# Altium PCB AVR精简学习板.PcbDoc (part 7 of 10)
Units mm, origin at the board's own origin, x right, y up, seen from the top; angles counter-clockwise.
Board outline 152.4 x 101.6 mm, 2 copper layers (Top Layer, Bottom Layer); 44 components, 51 nets, 211 pads, 6 vias.
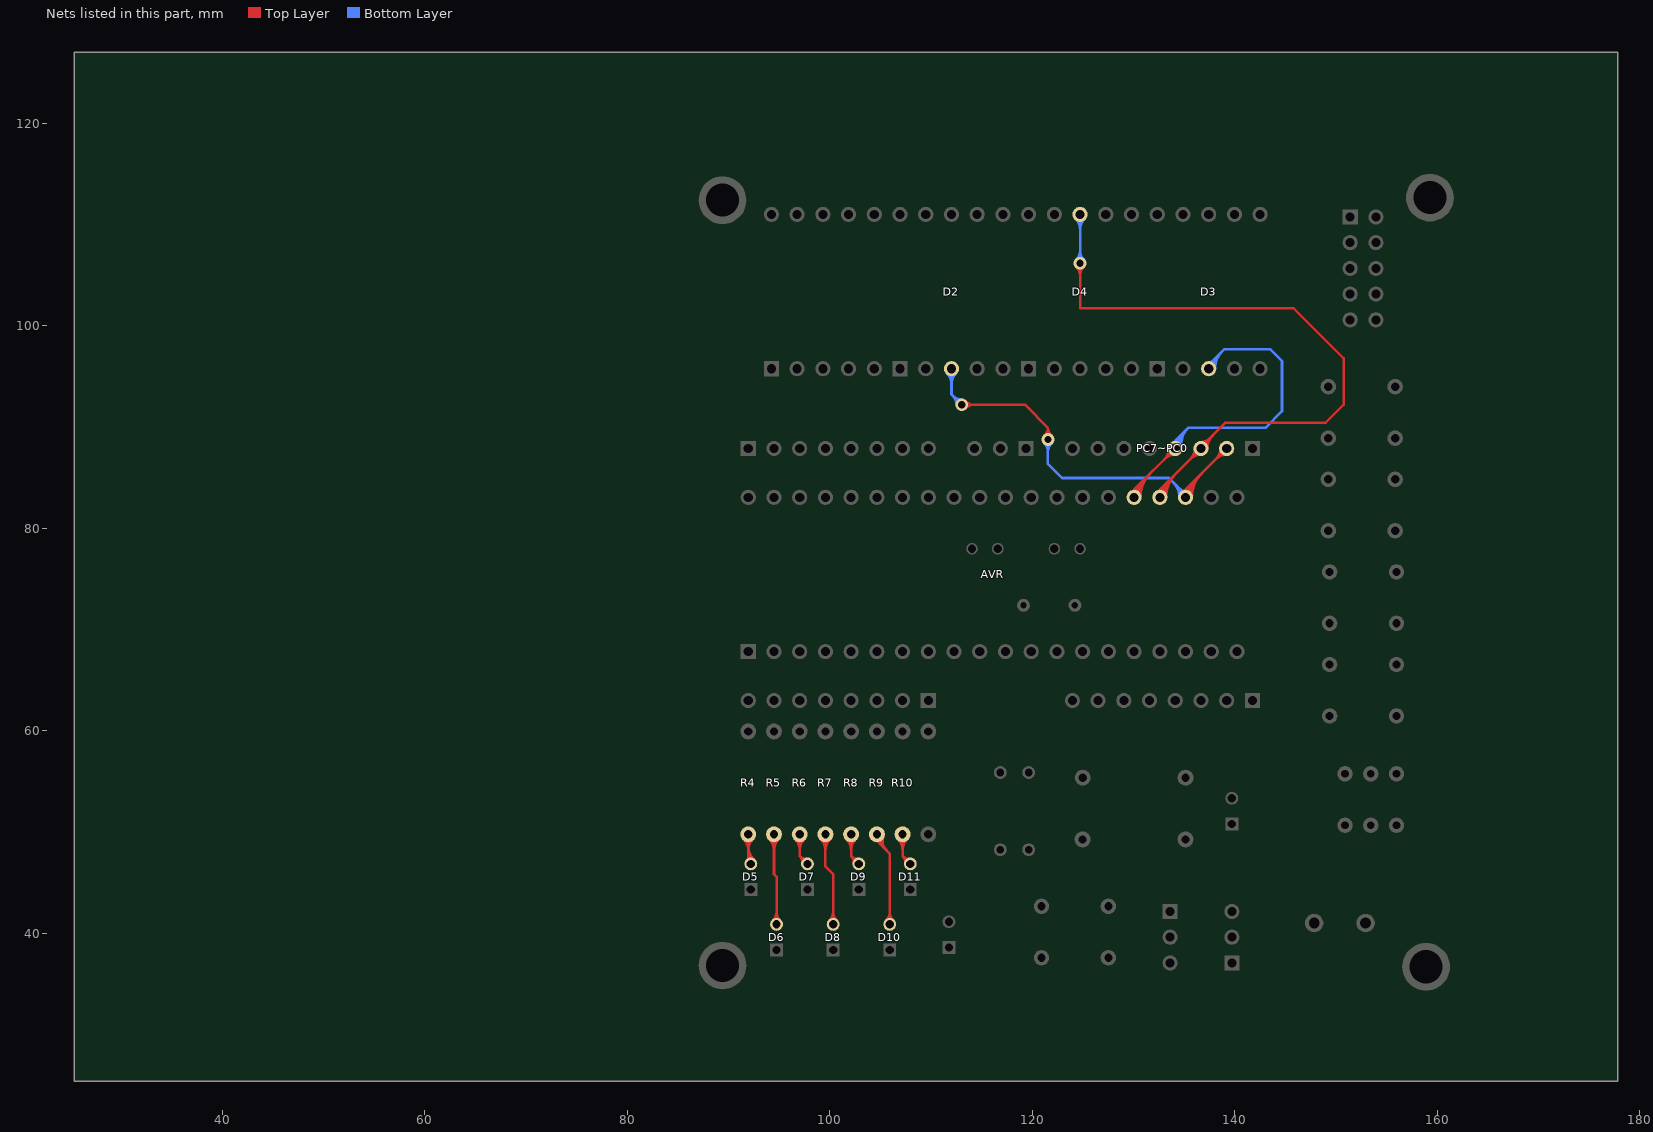
[diagram p7: the nets of this part, all layers, seen from the top]

## Via types
v1: diameter 1.27, hole 0.711, Top Layer to Bottom Layer, 6 vias

## Nets (pads, with @x,y where several pads share a name; then routed paths per layer and width w, separated by ;. In a path a pad name is that pad's centre, name@x,y a point inside that pad or via, vN(x,y) a via of type N, cw(c..) or ccw(c..) an arc to the next point about the centre after c; other vN are vias at no path point) (continued)
NetD2_3: AVR.23 D2.3 PC7~PC0.2 | length 224.9
  Top Layer w0.254: v1(113.03,92.202) 119.253,92.202 121.539,89.916 ; v1(121.539,88.773) 121.539,89.916 ; AVR.23@135.128,83.058 135.128,83.82 ; PC7~PC0.2@139.192,87.884 135.128,83.82 ; v1@113.389,91.843 cw(c114.256,90.976) 114.256,92.202 ; v1@113.389,91.843 cw(c114.256,90.976) 114.256,92.202 ; v1@113.389,91.843 cw(c114.256,90.976) 114.256,92.202 ; v1@113.389,91.843 cw(c114.256,90.976) 114.256,92.202 ; v1@113.389,91.843 cw(c114.256,90.976) 114.256,92.202 ; v1@113.389,91.843 cw(c114.256,90.976) 114.256,92.202 ; v1@113.389,91.843 cw(c114.256,90.976) 114.256,92.202 ; v1@113.389,92.561 ccw(c114.256,93.428) 114.256,92.202 ; v1@113.389,92.561 ccw(c114.256,93.428) 114.256,92.202 ; v1@113.389,92.561 ccw(c114.256,93.428) 114.256,92.202 ; v1@113.389,92.561 ccw(c114.256,93.428) 114.256,92.202 ; v1@113.389,92.561 ccw(c114.256,93.428) 114.256,92.202 ; v1@113.389,92.561 ccw(c114.256,93.428) 114.256,92.202 ; v1@113.389,92.561 ccw(c114.256,93.428) 114.256,92.202 ; v1@121.199,89.15 ccw(c120.507,89.916) 121.539,89.916 ; v1@121.199,89.15 ccw(c120.507,89.916) 121.539,89.916 ; v1@121.199,89.15 ccw(c120.507,89.916) 121.539,89.916 ; v1@121.199,89.15 ccw(c120.507,89.916) 121.539,89.916 ; v1@121.199,89.15 ccw(c120.507,89.916) 121.539,89.916 ; v1@121.199,89.15 ccw(c120.507,89.916) 121.539,89.916 ; v1@121.199,89.15 ccw(c120.507,89.916) 121.539,89.916 ; 121.539,89.916 ccw(c122.571,89.916) v1@121.879,89.15 ; 121.539,89.916 ccw(c122.571,89.916) v1@121.879,89.15 ; 121.539,89.916 ccw(c122.571,89.916) v1@121.879,89.15 ; 121.539,89.916 ccw(c122.571,89.916) v1@121.879,89.15 ; 121.539,89.916 ccw(c122.571,89.916) v1@121.879,89.15 ; 121.539,89.916 ccw(c122.571,89.916) v1@121.879,89.15 ; 121.539,89.916 ccw(c122.571,89.916) v1@121.879,89.15 ; AVR.23@134.989,83.058 cw(c136.493,83.058) 135.43,84.122 ; AVR.23@134.989,83.058 cw(c136.493,83.058) 135.43,84.122 ; AVR.23@134.989,83.058 cw(c136.493,83.058) 135.43,84.122 ; AVR.23@134.989,83.058 cw(c136.493,83.058) 135.43,84.122 ; AVR.23@134.989,83.058 cw(c136.493,83.058) 135.43,84.122 ; AVR.23@134.989,83.058 cw(c136.493,83.058) 135.43,84.122 ; AVR.23@134.989,83.058 cw(c136.493,83.058) 135.43,84.122 ; AVR.23@135.004,83.669 ccw(c134.974,83.82) 135.128,83.82 ; AVR.23@135.004,83.669 ccw(c134.974,83.82) 135.128,83.82 ; AVR.23@135.004,83.669 ccw(c134.974,83.82) 135.128,83.82 ; AVR.23@135.004,83.669 ccw(c134.974,83.82) 135.128,83.82 ; AVR.23@135.004,83.669 ccw(c134.974,83.82) 135.128,83.82 ; AVR.23@135.004,83.669 ccw(c134.974,83.82) 135.128,83.82 ; AVR.23@135.004,83.669 ccw(c134.974,83.82) 135.128,83.82 ; 135.128,83.82 ccw(c135.282,83.82) AVR.23@135.252,83.669 ; 135.128,83.82 ccw(c135.282,83.82) AVR.23@135.252,83.669 ; 135.128,83.82 ccw(c135.282,83.82) AVR.23@135.252,83.669 ; 135.128,83.82 ccw(c135.282,83.82) AVR.23@135.252,83.669 ; 135.128,83.82 ccw(c135.282,83.82) AVR.23@135.252,83.669 ; 135.128,83.82 ccw(c135.282,83.82) AVR.23@135.252,83.669 ; 135.128,83.82 ccw(c135.282,83.82) AVR.23@135.252,83.669 ; AVR.23@135.243,83.058 cw(c137.36,83.058) 135.863,84.555 ; AVR.23@135.243,83.058 cw(c137.36,83.058) 135.863,84.555 ; AVR.23@135.243,83.058 cw(c137.36,83.058) 135.863,84.555 ; AVR.23@135.243,83.058 cw(c137.36,83.058) 135.863,84.555 ; AVR.23@135.243,83.058 cw(c137.36,83.058) 135.863,84.555 ; AVR.23@135.243,83.058 cw(c137.36,83.058) 135.863,84.555 ; AVR.23@135.243,83.058 cw(c137.36,83.058) 135.863,84.555 ; AVR.23@135.497,83.058 cw(c138.227,83.058) 136.297,84.989 ; AVR.23@135.497,83.058 cw(c138.227,83.058) 136.297,84.989 ; AVR.23@135.497,83.058 cw(c138.227,83.058) 136.297,84.989 ; AVR.23@135.497,83.058 cw(c138.227,83.058) 136.297,84.989 ; AVR.23@135.497,83.058 cw(c138.227,83.058) 136.297,84.989 ; AVR.23@135.497,83.058 cw(c138.227,83.058) 136.297,84.989 ; AVR.23@135.497,83.058 cw(c138.227,83.058) 136.297,84.989 ; AVR.23@135.751,83.058 cw(c139.095,83.058) 136.73,85.422 ; AVR.23@135.751,83.058 cw(c139.095,83.058) 136.73,85.422 ; AVR.23@135.751,83.058 cw(c139.095,83.058) 136.73,85.422 ; AVR.23@135.751,83.058 cw(c139.095,83.058) 136.73,85.422 ; AVR.23@135.751,83.058 cw(c139.095,83.058) 136.73,85.422 ; AVR.23@135.751,83.058 cw(c139.095,83.058) 136.73,85.422 ; AVR.23@135.751,83.058 cw(c139.095,83.058) 136.73,85.422 ; 138.128,86.82 cw(c139.192,85.757) PC7~PC0.2@139.192,87.261 ; 138.128,86.82 ccw(c137.065,87.884) PC7~PC0.2@138.569,87.884 ; 138.128,86.82 cw(c139.192,85.757) PC7~PC0.2@139.192,87.261 ; 138.128,86.82 ccw(c137.065,87.884) PC7~PC0.2@138.569,87.884 ; 138.128,86.82 ccw(c137.065,87.884) PC7~PC0.2@138.569,87.884 ; 138.128,86.82 cw(c139.192,85.757) PC7~PC0.2@139.192,87.261 ; 138.128,86.82 ccw(c137.065,87.884) PC7~PC0.2@138.569,87.884 ; 138.128,86.82 cw(c139.192,85.757) PC7~PC0.2@139.192,87.261 ; 138.128,86.82 ccw(c137.065,87.884) PC7~PC0.2@138.569,87.884 ; 138.128,86.82 cw(c139.192,85.757) PC7~PC0.2@139.192,87.261 ; 138.128,86.82 ccw(c137.065,87.884) PC7~PC0.2@138.569,87.884 ; 138.128,86.82 cw(c139.192,85.757) PC7~PC0.2@139.192,87.261 ; 138.128,86.82 ccw(c137.065,87.884) PC7~PC0.2@138.569,87.884 ; 138.128,86.82 cw(c139.192,85.757) PC7~PC0.2@139.192,87.261 ; 138.562,87.254 cw(c139.192,86.624) PC7~PC0.2@139.192,87.515 ; 138.562,87.254 ccw(c137.932,87.884) PC7~PC0.2@138.823,87.884 ; 138.562,87.254 cw(c139.192,86.624) PC7~PC0.2@139.192,87.515 ; 138.562,87.254 ccw(c137.932,87.884) PC7~PC0.2@138.823,87.884 ; 138.562,87.254 ccw(c137.932,87.884) PC7~PC0.2@138.823,87.884 ; 138.562,87.254 cw(c139.192,86.624) PC7~PC0.2@139.192,87.515 ; 138.562,87.254 ccw(c137.932,87.884) PC7~PC0.2@138.823,87.884 ; 138.562,87.254 cw(c139.192,86.624) PC7~PC0.2@139.192,87.515 ; 138.562,87.254 ccw(c137.932,87.884) PC7~PC0.2@138.823,87.884 ; 138.562,87.254 cw(c139.192,86.624) PC7~PC0.2@139.192,87.515 ; 138.562,87.254 ccw(c137.932,87.884) PC7~PC0.2@138.823,87.884 ; 138.562,87.254 cw(c139.192,86.624) PC7~PC0.2@139.192,87.515 ; 138.562,87.254 ccw(c137.932,87.884) PC7~PC0.2@138.823,87.884 ; 138.562,87.254 cw(c139.192,86.624) PC7~PC0.2@139.192,87.515
  Bottom Layer w0.254: D2.3@112.014,95.758 112.014,93.218 v1(113.03,92.202) ; v1(121.539,88.773) 121.539,86.36 122.936,84.963 133.477,84.963 135.128,83.312 AVR.23@135.128,83.058 ; D2.3@111.573,95.317 cw(c110.51,94.254) 112.014,94.254 ; D2.3@111.573,95.317 cw(c110.51,94.254) 112.014,94.254 ; D2.3@111.573,95.317 cw(c110.51,94.254) 112.014,94.254 ; D2.3@111.573,95.317 cw(c110.51,94.254) 112.014,94.254 ; D2.3@111.573,95.317 cw(c110.51,94.254) 112.014,94.254 ; D2.3@111.573,95.317 cw(c110.51,94.254) 112.014,94.254 ; D2.3@111.573,95.317 cw(c110.51,94.254) 112.014,94.254 ; D2.3@111.753,95.497 cw(c111.123,94.867) 112.014,94.867 ; D2.3@111.753,95.497 cw(c111.123,94.867) 112.014,94.867 ; D2.3@111.753,95.497 cw(c111.123,94.867) 112.014,94.867 ; D2.3@111.753,95.497 cw(c111.123,94.867) 112.014,94.867 ; D2.3@111.753,95.497 cw(c111.123,94.867) 112.014,94.867 ; D2.3@111.753,95.497 cw(c111.123,94.867) 112.014,94.867 ; D2.3@111.753,95.497 cw(c111.123,94.867) 112.014,94.867 ; 112.014,94.254 cw(c113.518,94.254) D2.3@112.455,95.317 ; 112.014,94.254 cw(c113.518,94.254) D2.3@112.455,95.317 ; 112.014,94.254 cw(c113.518,94.254) D2.3@112.455,95.317 ; 112.014,94.254 cw(c113.518,94.254) D2.3@112.455,95.317 ; 112.014,94.254 cw(c113.518,94.254) D2.3@112.455,95.317 ; 112.014,94.254 cw(c113.518,94.254) D2.3@112.455,95.317 ; 112.014,94.254 cw(c113.518,94.254) D2.3@112.455,95.317 ; 112.014,94.867 cw(c112.905,94.867) D2.3@112.275,95.497 ; 112.014,94.867 cw(c112.905,94.867) D2.3@112.275,95.497 ; 112.014,94.867 cw(c112.905,94.867) D2.3@112.275,95.497 ; 112.014,94.867 cw(c112.905,94.867) D2.3@112.275,95.497 ; 112.014,94.867 cw(c112.905,94.867) D2.3@112.275,95.497 ; 112.014,94.867 cw(c112.905,94.867) D2.3@112.275,95.497 ; 112.014,94.867 cw(c112.905,94.867) D2.3@112.275,95.497 ; 112.163,93.069 cw(c111.296,92.202) v1@112.522,92.202 ; 112.163,93.069 ccw(c113.03,93.936) v1@113.03,92.71 ; 112.163,93.069 cw(c111.296,92.202) v1@112.522,92.202 ; 112.163,93.069 ccw(c113.03,93.936) v1@113.03,92.71 ; 112.163,93.069 ccw(c113.03,93.936) v1@113.03,92.71 ; 112.163,93.069 cw(c111.296,92.202) v1@112.522,92.202 ; 112.163,93.069 ccw(c113.03,93.936) v1@113.03,92.71 ; 112.163,93.069 cw(c111.296,92.202) v1@112.522,92.202 ; 112.163,93.069 ccw(c113.03,93.936) v1@113.03,92.71 ; 112.163,93.069 cw(c111.296,92.202) v1@112.522,92.202 ; 112.163,93.069 ccw(c113.03,93.936) v1@113.03,92.71 ; 112.163,93.069 cw(c111.296,92.202) v1@112.522,92.202 ; 112.163,93.069 ccw(c113.03,93.936) v1@113.03,92.71 ; 112.163,93.069 cw(c111.296,92.202) v1@112.522,92.202 ; v1@121.18,88.414 cw(c120.313,87.547) 121.539,87.547 ; v1@121.18,88.414 cw(c120.313,87.547) 121.539,87.547 ; v1@121.18,88.414 cw(c120.313,87.547) 121.539,87.547 ; v1@121.18,88.414 cw(c120.313,87.547) 121.539,87.547 ; v1@121.18,88.414 cw(c120.313,87.547) 121.539,87.547 ; v1@121.18,88.414 cw(c120.313,87.547) 121.539,87.547 ; v1@121.18,88.414 cw(c120.313,87.547) 121.539,87.547 ; 121.539,87.547 cw(c122.765,87.547) v1@121.898,88.414 ; 121.539,87.547 cw(c122.765,87.547) v1@121.898,88.414 ; 121.539,87.547 cw(c122.765,87.547) v1@121.898,88.414 ; 121.539,87.547 cw(c122.765,87.547) v1@121.898,88.414 ; 121.539,87.547 cw(c122.765,87.547) v1@121.898,88.414 ; 121.539,87.547 cw(c122.765,87.547) v1@121.898,88.414 ; 121.539,87.547 cw(c122.765,87.547) v1@121.898,88.414 ; 133.885,84.555 cw(c132.388,83.058) AVR.23@134.505,83.058 ; 133.885,84.555 cw(c132.388,83.058) AVR.23@134.505,83.058 ; 133.885,84.555 cw(c132.388,83.058) AVR.23@134.505,83.058 ; 133.885,84.555 cw(c132.388,83.058) AVR.23@134.505,83.058 ; 133.885,84.555 cw(c132.388,83.058) AVR.23@134.505,83.058 ; 133.885,84.555 cw(c132.388,83.058) AVR.23@134.505,83.058 ; 133.885,84.555 cw(c132.388,83.058) AVR.23@134.505,83.058 ; 134.318,84.122 cw(c133.255,83.058) AVR.23@134.759,83.058 ; 134.318,84.122 cw(c133.255,83.058) AVR.23@134.759,83.058 ; 134.318,84.122 cw(c133.255,83.058) AVR.23@134.759,83.058 ; 134.318,84.122 cw(c133.255,83.058) AVR.23@134.759,83.058 ; 134.318,84.122 cw(c133.255,83.058) AVR.23@134.759,83.058 ; 134.318,84.122 cw(c133.255,83.058) AVR.23@134.759,83.058 ; 134.318,84.122 cw(c133.255,83.058) AVR.23@134.759,83.058 ; 134.498,83.942 ccw(c135.128,84.572) AVR.23@135.128,83.681 ; 134.498,83.942 ccw(c135.128,84.572) AVR.23@135.128,83.681 ; 134.498,83.942 ccw(c135.128,84.572) AVR.23@135.128,83.681 ; 134.498,83.942 ccw(c135.128,84.572) AVR.23@135.128,83.681 ; 134.498,83.942 ccw(c135.128,84.572) AVR.23@135.128,83.681 ; 134.498,83.942 ccw(c135.128,84.572) AVR.23@135.128,83.681 ; 134.498,83.942 ccw(c135.128,84.572) AVR.23@135.128,83.681
NetD3_3: AVR.25 D3.3 PC7~PC0.4 | length 195.9
  Top Layer w0.254: AVR.25@130.048,83.058 130.048,83.82 ; PC7~PC0.4@134.112,87.884 130.048,83.82 ; AVR.25@129.909,83.058 cw(c131.413,83.058) 130.35,84.122 ; AVR.25@129.909,83.058 cw(c131.413,83.058) 130.35,84.122 ; AVR.25@129.909,83.058 cw(c131.413,83.058) 130.35,84.122 ; AVR.25@129.909,83.058 cw(c131.413,83.058) 130.35,84.122 ; AVR.25@129.909,83.058 cw(c131.413,83.058) 130.35,84.122 ; AVR.25@129.909,83.058 cw(c131.413,83.058) 130.35,84.122 ; AVR.25@129.909,83.058 cw(c131.413,83.058) 130.35,84.122 ; AVR.25@129.924,83.669 ccw(c129.894,83.82) 130.048,83.82 ; AVR.25@129.924,83.669 ccw(c129.894,83.82) 130.048,83.82 ; AVR.25@129.924,83.669 ccw(c129.894,83.82) 130.048,83.82 ; AVR.25@129.924,83.669 ccw(c129.894,83.82) 130.048,83.82 ; AVR.25@129.924,83.669 ccw(c129.894,83.82) 130.048,83.82 ; AVR.25@129.924,83.669 ccw(c129.894,83.82) 130.048,83.82 ; AVR.25@129.924,83.669 ccw(c129.894,83.82) 130.048,83.82 ; 130.048,83.82 ccw(c130.202,83.82) AVR.25@130.172,83.669 ; 130.048,83.82 ccw(c130.202,83.82) AVR.25@130.172,83.669 ; 130.048,83.82 ccw(c130.202,83.82) AVR.25@130.172,83.669 ; 130.048,83.82 ccw(c130.202,83.82) AVR.25@130.172,83.669 ; 130.048,83.82 ccw(c130.202,83.82) AVR.25@130.172,83.669 ; 130.048,83.82 ccw(c130.202,83.82) AVR.25@130.172,83.669 ; 130.048,83.82 ccw(c130.202,83.82) AVR.25@130.172,83.669 ; AVR.25@130.163,83.058 cw(c132.28,83.058) 130.783,84.555 ; AVR.25@130.163,83.058 cw(c132.28,83.058) 130.783,84.555 ; AVR.25@130.163,83.058 cw(c132.28,83.058) 130.783,84.555 ; AVR.25@130.163,83.058 cw(c132.28,83.058) 130.783,84.555 ; AVR.25@130.163,83.058 cw(c132.28,83.058) 130.783,84.555 ; AVR.25@130.163,83.058 cw(c132.28,83.058) 130.783,84.555 ; AVR.25@130.163,83.058 cw(c132.28,83.058) 130.783,84.555 ; AVR.25@130.417,83.058 cw(c133.147,83.058) 131.217,84.989 ; AVR.25@130.417,83.058 cw(c133.147,83.058) 131.217,84.989 ; AVR.25@130.417,83.058 cw(c133.147,83.058) 131.217,84.989 ; AVR.25@130.417,83.058 cw(c133.147,83.058) 131.217,84.989 ; AVR.25@130.417,83.058 cw(c133.147,83.058) 131.217,84.989 ; AVR.25@130.417,83.058 cw(c133.147,83.058) 131.217,84.989 ; AVR.25@130.417,83.058 cw(c133.147,83.058) 131.217,84.989 ; AVR.25@130.671,83.058 cw(c134.015,83.058) 131.65,85.422 ; AVR.25@130.671,83.058 cw(c134.015,83.058) 131.65,85.422 ; AVR.25@130.671,83.058 cw(c134.015,83.058) 131.65,85.422 ; AVR.25@130.671,83.058 cw(c134.015,83.058) 131.65,85.422 ; AVR.25@130.671,83.058 cw(c134.015,83.058) 131.65,85.422 ; AVR.25@130.671,83.058 cw(c134.015,83.058) 131.65,85.422 ; AVR.25@130.671,83.058 cw(c134.015,83.058) 131.65,85.422 ; 133.048,86.82 cw(c134.112,85.757) PC7~PC0.4@134.112,87.261 ; 133.048,86.82 ccw(c131.985,87.884) PC7~PC0.4@133.489,87.884 ; 133.048,86.82 cw(c134.112,85.757) PC7~PC0.4@134.112,87.261 ; 133.048,86.82 ccw(c131.985,87.884) PC7~PC0.4@133.489,87.884 ; 133.048,86.82 ccw(c131.985,87.884) PC7~PC0.4@133.489,87.884 ; 133.048,86.82 cw(c134.112,85.757) PC7~PC0.4@134.112,87.261 ; 133.048,86.82 ccw(c131.985,87.884) PC7~PC0.4@133.489,87.884 ; 133.048,86.82 cw(c134.112,85.757) PC7~PC0.4@134.112,87.261 ; 133.048,86.82 ccw(c131.985,87.884) PC7~PC0.4@133.489,87.884 ; 133.048,86.82 cw(c134.112,85.757) PC7~PC0.4@134.112,87.261 ; 133.048,86.82 ccw(c131.985,87.884) PC7~PC0.4@133.489,87.884 ; 133.048,86.82 cw(c134.112,85.757) PC7~PC0.4@134.112,87.261 ; 133.048,86.82 ccw(c131.985,87.884) PC7~PC0.4@133.489,87.884 ; 133.048,86.82 cw(c134.112,85.757) PC7~PC0.4@134.112,87.261 ; 133.482,87.254 cw(c134.112,86.624) PC7~PC0.4@134.112,87.515 ; 133.482,87.254 ccw(c132.852,87.884) PC7~PC0.4@133.743,87.884 ; 133.482,87.254 cw(c134.112,86.624) PC7~PC0.4@134.112,87.515 ; 133.482,87.254 ccw(c132.852,87.884) PC7~PC0.4@133.743,87.884 ; 133.482,87.254 ccw(c132.852,87.884) PC7~PC0.4@133.743,87.884 ; 133.482,87.254 cw(c134.112,86.624) PC7~PC0.4@134.112,87.515 ; 133.482,87.254 ccw(c132.852,87.884) PC7~PC0.4@133.743,87.884 ; 133.482,87.254 cw(c134.112,86.624) PC7~PC0.4@134.112,87.515 ; 133.482,87.254 ccw(c132.852,87.884) PC7~PC0.4@133.743,87.884 ; 133.482,87.254 cw(c134.112,86.624) PC7~PC0.4@134.112,87.515 ; 133.482,87.254 ccw(c132.852,87.884) PC7~PC0.4@133.743,87.884 ; 133.482,87.254 cw(c134.112,86.624) PC7~PC0.4@134.112,87.515 ; 133.482,87.254 ccw(c132.852,87.884) PC7~PC0.4@133.743,87.884 ; 133.482,87.254 cw(c134.112,86.624) PC7~PC0.4@134.112,87.515
  Bottom Layer w0.254: PC7~PC0.4@134.112,87.884 134.112,88.646 ; D3.3@137.414,95.758 137.414,96.139 138.938,97.663 143.51,97.663 144.653,96.52 144.653,91.567 143.002,89.916 135.382,89.916 ; PC7~PC0.4@133.974,87.865 cw(c135.11,88.023) 134.299,88.833 ; PC7~PC0.4@133.974,87.865 cw(c135.11,88.023) 134.299,88.833 ; PC7~PC0.4@133.974,87.865 cw(c135.11,88.023) 134.299,88.833 ; PC7~PC0.4@133.974,87.865 cw(c135.11,88.023) 134.299,88.833 ; PC7~PC0.4@133.974,87.865 cw(c135.11,88.023) 134.299,88.833 ; PC7~PC0.4@133.974,87.865 cw(c135.11,88.023) 134.299,88.833 ; PC7~PC0.4@133.974,87.865 cw(c135.11,88.023) 134.299,88.833 ; PC7~PC0.4@133.988,88.495 ccw(c133.958,88.646) 134.112,88.646 ; PC7~PC0.4@133.988,88.495 ccw(c133.958,88.646) 134.112,88.646 ; PC7~PC0.4@133.988,88.495 ccw(c133.958,88.646) 134.112,88.646 ; PC7~PC0.4@133.988,88.495 ccw(c133.958,88.646) 134.112,88.646 ; PC7~PC0.4@133.988,88.495 ccw(c133.958,88.646) 134.112,88.646 ; PC7~PC0.4@133.988,88.495 ccw(c133.958,88.646) 134.112,88.646 ; PC7~PC0.4@133.988,88.495 ccw(c133.958,88.646) 134.112,88.646 ; 134.112,88.646 ccw(c134.266,88.646) PC7~PC0.4@134.236,88.495 ; 134.112,88.646 ccw(c134.266,88.646) PC7~PC0.4@134.236,88.495 ; 134.112,88.646 ccw(c134.266,88.646) PC7~PC0.4@134.236,88.495 ; 134.112,88.646 ccw(c134.266,88.646) PC7~PC0.4@134.236,88.495 ; 134.112,88.646 ccw(c134.266,88.646) PC7~PC0.4@134.236,88.495 ; 134.112,88.646 ccw(c134.266,88.646) PC7~PC0.4@134.236,88.495 ; 134.112,88.646 ccw(c134.266,88.646) PC7~PC0.4@134.236,88.495 ; 134.112,88.646 135.382,89.916 ; PC7~PC0.4@134.226,87.9 cw(c135.743,88.111) 134.66,89.194 ; PC7~PC0.4@134.226,87.9 cw(c135.743,88.111) 134.66,89.194 ; PC7~PC0.4@134.226,87.9 cw(c135.743,88.111) 134.66,89.194 ; PC7~PC0.4@134.226,87.9 cw(c135.743,88.111) 134.66,89.194 ; PC7~PC0.4@134.226,87.9 cw(c135.743,88.111) 134.66,89.194 ; PC7~PC0.4@134.226,87.9 cw(c135.743,88.111) 134.66,89.194 ; PC7~PC0.4@134.226,87.9 cw(c135.743,88.111) 134.66,89.194 ; PC7~PC0.4@134.477,87.935 cw(c136.377,88.199) 135.021,89.555 ; PC7~PC0.4@134.477,87.935 cw(c136.377,88.199) 135.021,89.555 ; PC7~PC0.4@134.477,87.935 cw(c136.377,88.199) 135.021,89.555 ; PC7~PC0.4@134.477,87.935 cw(c136.377,88.199) 135.021,89.555 ; PC7~PC0.4@134.477,87.935 cw(c136.377,88.199) 135.021,89.555 ; PC7~PC0.4@134.477,87.935 cw(c136.377,88.199) 135.021,89.555 ; PC7~PC0.4@134.477,87.935 cw(c136.377,88.199) 135.021,89.555 ; PC7~PC0.4@134.729,87.97 cw(c137.011,88.287) 135.382,89.916 ; PC7~PC0.4@134.729,87.97 cw(c137.011,88.287) 135.382,89.916 ; PC7~PC0.4@134.729,87.97 cw(c137.011,88.287) 135.382,89.916 ; PC7~PC0.4@134.729,87.97 cw(c137.011,88.287) 135.382,89.916 ; PC7~PC0.4@134.729,87.97 cw(c137.011,88.287) 135.382,89.916 ; PC7~PC0.4@134.729,87.97 cw(c137.011,88.287) 135.382,89.916 ; PC7~PC0.4@134.729,87.97 cw(c137.011,88.287) 135.382,89.916 ; D3.3@137.414,96.381 ccw(c137.414,96.965) 137.827,96.552 ; D3.3@137.414,96.381 ccw(c137.414,96.965) 137.827,96.552 ; D3.3@137.414,96.381 ccw(c137.414,96.965) 137.827,96.552 ; D3.3@137.414,96.381 ccw(c137.414,96.965) 137.827,96.552 ; D3.3@137.414,96.381 ccw(c137.414,96.965) 137.827,96.552 ; D3.3@137.414,96.381 ccw(c137.414,96.965) 137.827,96.552 ; D3.3@137.414,96.381 ccw(c137.414,96.965) 137.827,96.552 ; D3.3@137.529,95.758 cw(c138.726,95.758) 137.88,96.605 ; D3.3@137.529,95.758 cw(c138.726,95.758) 137.88,96.605 ; D3.3@137.529,95.758 cw(c138.726,95.758) 137.88,96.605 ; D3.3@137.529,95.758 cw(c138.726,95.758) 137.88,96.605 ; D3.3@137.529,95.758 cw(c138.726,95.758) 137.88,96.605 ; D3.3@137.529,95.758 cw(c138.726,95.758) 137.88,96.605 ; D3.3@137.529,95.758 cw(c138.726,95.758) 137.88,96.605 ; D3.3@137.783,95.758 cw(c139.594,95.758) 138.313,97.038 ; D3.3@137.783,95.758 cw(c139.594,95.758) 138.313,97.038 ; D3.3@137.783,95.758 cw(c139.594,95.758) 138.313,97.038 ; D3.3@137.783,95.758 cw(c139.594,95.758) 138.313,97.038 ; D3.3@137.783,95.758 cw(c139.594,95.758) 138.313,97.038 ; D3.3@137.783,95.758 cw(c139.594,95.758) 138.313,97.038 ; D3.3@137.783,95.758 cw(c139.594,95.758) 138.313,97.038 ; D3.3@138.037,95.758 cw(c140.461,95.758) 138.747,97.472 ; D3.3@138.037,95.758 cw(c140.461,95.758) 138.747,97.472 ; D3.3@138.037,95.758 cw(c140.461,95.758) 138.747,97.472 ; D3.3@138.037,95.758 cw(c140.461,95.758) 138.747,97.472 ; D3.3@138.037,95.758 cw(c140.461,95.758) 138.747,97.472 ; D3.3@138.037,95.758 cw(c140.461,95.758) 138.747,97.472 ; D3.3@138.037,95.758 cw(c140.461,95.758) 138.747,97.472
NetD4_3: AVR.24 D4.8 PC7~PC0.3 | length 223.4
  Top Layer w0.254: v1(124.714,106.172) 124.714,101.727 145.796,101.727 150.749,96.774 150.749,92.202 148.971,90.424 139.065,90.424 136.652,88.011 PC7~PC0.3@136.652,87.884 132.588,83.82 ; AVR.24@132.588,83.058 132.588,83.82 ; v1@124.355,105.813 cw(c123.488,104.946) 124.714,104.946 ; v1@124.355,105.813 cw(c123.488,104.946) 124.714,104.946 ; v1@124.355,105.813 cw(c123.488,104.946) 124.714,104.946 ; v1@124.355,105.813 cw(c123.488,104.946) 124.714,104.946 ; v1@124.355,105.813 cw(c123.488,104.946) 124.714,104.946 ; v1@124.355,105.813 cw(c123.488,104.946) 124.714,104.946 ; v1@124.355,105.813 cw(c123.488,104.946) 124.714,104.946 ; 124.714,104.946 cw(c125.94,104.946) v1@125.073,105.813 ; 124.714,104.946 cw(c125.94,104.946) v1@125.073,105.813 ; 124.714,104.946 cw(c125.94,104.946) v1@125.073,105.813 ; 124.714,104.946 cw(c125.94,104.946) v1@125.073,105.813 ; 124.714,104.946 cw(c125.94,104.946) v1@125.073,105.813 ; 124.714,104.946 cw(c125.94,104.946) v1@125.073,105.813 ; 124.714,104.946 cw(c125.94,104.946) v1@125.073,105.813 ; AVR.24@132.449,83.058 cw(c133.953,83.058) 132.89,84.122 ; AVR.24@132.449,83.058 cw(c133.953,83.058) 132.89,84.122 ; AVR.24@132.449,83.058 cw(c133.953,83.058) 132.89,84.122 ; AVR.24@132.449,83.058 cw(c133.953,83.058) 132.89,84.122 ; AVR.24@132.449,83.058 cw(c133.953,83.058) 132.89,84.122 ; AVR.24@132.449,83.058 cw(c133.953,83.058) 132.89,84.122 ; AVR.24@132.449,83.058 cw(c133.953,83.058) 132.89,84.122 ; AVR.24@132.464,83.669 ccw(c132.434,83.82) 132.588,83.82 ; AVR.24@132.464,83.669 ccw(c132.434,83.82) 132.588,83.82 ; AVR.24@132.464,83.669 ccw(c132.434,83.82) 132.588,83.82 ; AVR.24@132.464,83.669 ccw(c132.434,83.82) 132.588,83.82 ; AVR.24@132.464,83.669 ccw(c132.434,83.82) 132.588,83.82 ; AVR.24@132.464,83.669 ccw(c132.434,83.82) 132.588,83.82 ; AVR.24@132.464,83.669 ccw(c132.434,83.82) 132.588,83.82 ; 132.588,83.82 ccw(c132.742,83.82) AVR.24@132.712,83.669 ; 132.588,83.82 ccw(c132.742,83.82) AVR.24@132.712,83.669 ; 132.588,83.82 ccw(c132.742,83.82) AVR.24@132.712,83.669 ; 132.588,83.82 ccw(c132.742,83.82) AVR.24@132.712,83.669 ; 132.588,83.82 ccw(c132.742,83.82) AVR.24@132.712,83.669 ; 132.588,83.82 ccw(c132.742,83.82) AVR.24@132.712,83.669 ; 132.588,83.82 ccw(c132.742,83.82) AVR.24@132.712,83.669 ; AVR.24@132.703,83.058 cw(c134.82,83.058) 133.323,84.555 ; AVR.24@132.703,83.058 cw(c134.82,83.058) 133.323,84.555 ; AVR.24@132.703,83.058 cw(c134.82,83.058) 133.323,84.555 ; AVR.24@132.703,83.058 cw(c134.82,83.058) 133.323,84.555 ; AVR.24@132.703,83.058 cw(c134.82,83.058) 133.323,84.555 ; AVR.24@132.703,83.058 cw(c134.82,83.058) 133.323,84.555 ; AVR.24@132.703,83.058 cw(c134.82,83.058) 133.323,84.555 ; AVR.24@132.957,83.058 cw(c135.687,83.058) 133.757,84.989 ; AVR.24@132.957,83.058 cw(c135.687,83.058) 133.757,84.989 ; AVR.24@132.957,83.058 cw(c135.687,83.058) 133.757,84.989 ; AVR.24@132.957,83.058 cw(c135.687,83.058) 133.757,84.989 ; AVR.24@132.957,83.058 cw(c135.687,83.058) 133.757,84.989 ; AVR.24@132.957,83.058 cw(c135.687,83.058) 133.757,84.989 ; AVR.24@132.957,83.058 cw(c135.687,83.058) 133.757,84.989 ; AVR.24@133.211,83.058 cw(c136.555,83.058) 134.19,85.422 ; AVR.24@133.211,83.058 cw(c136.555,83.058) 134.19,85.422 ; AVR.24@133.211,83.058 cw(c136.555,83.058) 134.19,85.422 ; AVR.24@133.211,83.058 cw(c136.555,83.058) 134.19,85.422 ; AVR.24@133.211,83.058 cw(c136.555,83.058) 134.19,85.422 ; AVR.24@133.211,83.058 cw(c136.555,83.058) 134.19,85.422 ; AVR.24@133.211,83.058 cw(c136.555,83.058) 134.19,85.422 ; 135.588,86.82 cw(c136.652,85.757) PC7~PC0.3@136.652,87.261 ; 135.588,86.82 ccw(c134.525,87.884) PC7~PC0.3@136.029,87.884 ; 135.588,86.82 cw(c136.652,85.757) PC7~PC0.3@136.652,87.261 ; 135.588,86.82 ccw(c134.525,87.884) PC7~PC0.3@136.029,87.884 ; 135.588,86.82 ccw(c134.525,87.884) PC7~PC0.3@136.029,87.884 ; 135.588,86.82 cw(c136.652,85.757) PC7~PC0.3@136.652,87.261 ; 135.588,86.82 ccw(c134.525,87.884) PC7~PC0.3@136.029,87.884 ; 135.588,86.82 cw(c136.652,85.757) PC7~PC0.3@136.652,87.261 ; 135.588,86.82 ccw(c134.525,87.884) PC7~PC0.3@136.029,87.884 ; 135.588,86.82 cw(c136.652,85.757) PC7~PC0.3@136.652,87.261 ; 135.588,86.82 ccw(c134.525,87.884) PC7~PC0.3@136.029,87.884 ; 135.588,86.82 cw(c136.652,85.757) PC7~PC0.3@136.652,87.261 ; 135.588,86.82 ccw(c134.525,87.884) PC7~PC0.3@136.029,87.884 ; 135.588,86.82 cw(c136.652,85.757) PC7~PC0.3@136.652,87.261 ; 136.022,87.254 cw(c136.652,86.624) PC7~PC0.3@136.652,87.515 ; 136.022,87.254 ccw(c135.392,87.884) PC7~PC0.3@136.283,87.884 ; 136.022,87.254 cw(c136.652,86.624) PC7~PC0.3@136.652,87.515 ; 136.022,87.254 ccw(c135.392,87.884) PC7~PC0.3@136.283,87.884 ; 136.022,87.254 ccw(c135.392,87.884) PC7~PC0.3@136.283,87.884 ; 136.022,87.254 cw(c136.652,86.624) PC7~PC0.3@136.652,87.515 ; 136.022,87.254 ccw(c135.392,87.884) PC7~PC0.3@136.283,87.884 ; 136.022,87.254 cw(c136.652,86.624) PC7~PC0.3@136.652,87.515 ; 136.022,87.254 ccw(c135.392,87.884) PC7~PC0.3@136.283,87.884 ; 136.022,87.254 cw(c136.652,86.624) PC7~PC0.3@136.652,87.515 ; 136.022,87.254 ccw(c135.392,87.884) PC7~PC0.3@136.283,87.884 ; 136.022,87.254 cw(c136.652,86.624) PC7~PC0.3@136.652,87.515 ; 136.022,87.254 ccw(c135.392,87.884) PC7~PC0.3@136.283,87.884 ; 136.022,87.254 cw(c136.652,86.624) PC7~PC0.3@136.652,87.515 ; PC7~PC0.3@136.652,88.507 ccw(c136.652,89.704) 137.499,88.858 ; PC7~PC0.3@136.652,88.507 ccw(c136.652,89.704) 137.499,88.858 ; PC7~PC0.3@136.652,88.507 ccw(c136.652,89.704) 137.499,88.858 ; PC7~PC0.3@136.652,88.507 ccw(c136.652,89.704) 137.499,88.858 ; PC7~PC0.3@136.652,88.507 ccw(c136.652,89.704) 137.499,88.858 ; PC7~PC0.3@136.652,88.507 ccw(c136.652,89.704) 137.499,88.858 ; PC7~PC0.3@136.652,88.507 ccw(c136.652,89.704) 137.499,88.858 ; PC7~PC0.3@137.021,87.884 cw(c138.218,87.884) 137.372,88.731 ; PC7~PC0.3@137.021,87.884 cw(c138.218,87.884) 137.372,88.731 ; PC7~PC0.3@137.021,87.884 cw(c138.218,87.884) 137.372,88.731 ; PC7~PC0.3@137.021,87.884 cw(c138.218,87.884) 137.372,88.731 ; PC7~PC0.3@137.021,87.884 cw(c138.218,87.884) 137.372,88.731 ; PC7~PC0.3@137.021,87.884 cw(c138.218,87.884) 137.372,88.731 ; PC7~PC0.3@137.021,87.884 cw(c138.218,87.884) 137.372,88.731 ; PC7~PC0.3@137.275,87.884 cw(c139.086,87.884) 137.805,89.164 ; PC7~PC0.3@137.275,87.884 cw(c139.086,87.884) 137.805,89.164 ; PC7~PC0.3@137.275,87.884 cw(c139.086,87.884) 137.805,89.164 ; PC7~PC0.3@137.275,87.884 cw(c139.086,87.884) 137.805,89.164 ; PC7~PC0.3@137.275,87.884 cw(c139.086,87.884) 137.805,89.164 ; PC7~PC0.3@137.275,87.884 cw(c139.086,87.884) 137.805,89.164 ; PC7~PC0.3@137.275,87.884 cw(c139.086,87.884) 137.805,89.164
  Bottom Layer w0.254: v1(124.714,106.172) D4.8@124.714,110.998 ; D4.8@124.273,110.557 cw(c123.21,109.494) 124.714,109.494 ; D4.8@124.273,110.557 cw(c123.21,109.494) 124.714,109.494 ; D4.8@124.273,110.557 cw(c123.21,109.494) 124.714,109.494 ; D4.8@124.273,110.557 cw(c123.21,109.494) 124.714,109.494 ; D4.8@124.273,110.557 cw(c123.21,109.494) 124.714,109.494 ; D4.8@124.273,110.557 cw(c123.21,109.494) 124.714,109.494 ; D4.8@124.273,110.557 cw(c123.21,109.494) 124.714,109.494 ; v1@124.355,106.531 ccw(c123.488,107.398) 124.714,107.398 ; v1@124.355,106.531 ccw(c123.488,107.398) 124.714,107.398 ; v1@124.355,106.531 ccw(c123.488,107.398) 124.714,107.398 ; v1@124.355,106.531 ccw(c123.488,107.398) 124.714,107.398 ; v1@124.355,106.531 ccw(c123.488,107.398) 124.714,107.398 ; v1@124.355,106.531 ccw(c123.488,107.398) 124.714,107.398 ; v1@124.355,106.531 ccw(c123.488,107.398) 124.714,107.398 ; D4.8@124.453,110.737 cw(c123.823,110.107) 124.714,110.107 ; D4.8@124.453,110.737 cw(c123.823,110.107) 124.714,110.107 ; D4.8@124.453,110.737 cw(c123.823,110.107) 124.714,110.107 ; D4.8@124.453,110.737 cw(c123.823,110.107) 124.714,110.107 ; D4.8@124.453,110.737 cw(c123.823,110.107) 124.714,110.107 ; D4.8@124.453,110.737 cw(c123.823,110.107) 124.714,110.107 ; D4.8@124.453,110.737 cw(c123.823,110.107) 124.714,110.107 ; 124.714,107.398 ccw(c125.94,107.398) v1@125.073,106.531 ; 124.714,107.398 ccw(c125.94,107.398) v1@125.073,106.531 ; 124.714,107.398 ccw(c125.94,107.398) v1@125.073,106.531 ; 124.714,107.398 ccw(c125.94,107.398) v1@125.073,106.531 ; 124.714,107.398 ccw(c125.94,107.398) v1@125.073,106.531 ; 124.714,107.398 ccw(c125.94,107.398) v1@125.073,106.531 ; 124.714,107.398 ccw(c125.94,107.398) v1@125.073,106.531 ; 124.714,109.494 cw(c126.218,109.494) D4.8@125.155,110.557 ; 124.714,109.494 cw(c126.218,109.494) D4.8@125.155,110.557 ; 124.714,109.494 cw(c126.218,109.494) D4.8@125.155,110.557 ; 124.714,109.494 cw(c126.218,109.494) D4.8@125.155,110.557 ; 124.714,109.494 cw(c126.218,109.494) D4.8@125.155,110.557 ; 124.714,109.494 cw(c126.218,109.494) D4.8@125.155,110.557 ; 124.714,109.494 cw(c126.218,109.494) D4.8@125.155,110.557 ; 124.714,110.107 cw(c125.605,110.107) D4.8@124.975,110.737 ; 124.714,110.107 cw(c125.605,110.107) D4.8@124.975,110.737 ; 124.714,110.107 cw(c125.605,110.107) D4.8@124.975,110.737 ; 124.714,110.107 cw(c125.605,110.107) D4.8@124.975,110.737 ; 124.714,110.107 cw(c125.605,110.107) D4.8@124.975,110.737 ; 124.714,110.107 cw(c125.605,110.107) D4.8@124.975,110.737 ; 124.714,110.107 cw(c125.605,110.107) D4.8@124.975,110.737
NetD5_2: D5.2 R4.1 | length 57.7
  Top Layer w0.254: R4.1@91.949,49.78 91.949,47.116 D5.2@92.202,46.863 ; R4.1@91.482,49.313 cw(c90.355,48.186) 91.949,48.186 ; R4.1@91.482,49.313 cw(c90.355,48.186) 91.949,48.186 ; R4.1@91.482,49.313 cw(c90.355,48.186) 91.949,48.186 ; R4.1@91.482,49.313 cw(c90.355,48.186) 91.949,48.186 ; R4.1@91.482,49.313 cw(c90.355,48.186) 91.949,48.186 ; R4.1@91.482,49.313 cw(c90.355,48.186) 91.949,48.186 ; R4.1@91.482,49.313 cw(c90.355,48.186) 91.949,48.186 ; R4.1@91.662,49.493 cw(c90.968,48.799) 91.949,48.799 ; R4.1@91.662,49.493 cw(c90.968,48.799) 91.949,48.799 ; R4.1@91.662,49.493 cw(c90.968,48.799) 91.949,48.799 ; R4.1@91.662,49.493 cw(c90.968,48.799) 91.949,48.799 ; R4.1@91.662,49.493 cw(c90.968,48.799) 91.949,48.799 ; R4.1@91.662,49.493 cw(c90.968,48.799) 91.949,48.799 ; R4.1@91.662,49.493 cw(c90.968,48.799) 91.949,48.799 ; D5.2@91.843,47.222 ccw(c91.586,47.479) 91.949,47.479 ; D5.2@91.843,47.222 ccw(c91.586,47.479) 91.949,47.479 ; D5.2@91.843,47.222 ccw(c91.586,47.479) 91.949,47.479 ; D5.2@91.843,47.222 ccw(c91.586,47.479) 91.949,47.479 ; D5.2@91.843,47.222 ccw(c91.586,47.479) 91.949,47.479 ; D5.2@91.843,47.222 ccw(c91.586,47.479) 91.949,47.479 ; D5.2@91.843,47.222 ccw(c91.586,47.479) 91.949,47.479 ; 91.949,47.474 ccw(c92.813,47.474) D5.2@92.202,46.863 ; 91.949,47.474 ccw(c92.813,47.474) D5.2@92.202,46.863 ; 91.949,47.474 ccw(c92.813,47.474) D5.2@92.202,46.863 ; 91.949,47.474 ccw(c92.813,47.474) D5.2@92.202,46.863 ; 91.949,47.474 ccw(c92.813,47.474) D5.2@92.202,46.863 ; 91.949,47.474 ccw(c92.813,47.474) D5.2@92.202,46.863 ; 91.949,47.474 ccw(c92.813,47.474) D5.2@92.202,46.863 ; 91.949,48.087 ccw(c93.426,48.087) D5.2@92.382,47.043 ; 91.949,48.087 ccw(c93.426,48.087) D5.2@92.382,47.043 ; 91.949,48.087 ccw(c93.426,48.087) D5.2@92.382,47.043 ; 91.949,48.087 ccw(c93.426,48.087) D5.2@92.382,47.043 ; 91.949,48.087 ccw(c93.426,48.087) D5.2@92.382,47.043 ; 91.949,48.087 ccw(c93.426,48.087) D5.2@92.382,47.043 ; 91.949,48.087 ccw(c93.426,48.087) D5.2@92.382,47.043 ; 91.949,48.186 cw(c93.543,48.186) R4.1@92.416,49.313 ; 91.949,48.186 cw(c93.543,48.186) R4.1@92.416,49.313 ; 91.949,48.186 cw(c93.543,48.186) R4.1@92.416,49.313 ; 91.949,48.186 cw(c93.543,48.186) R4.1@92.416,49.313 ; 91.949,48.186 cw(c93.543,48.186) R4.1@92.416,49.313 ; 91.949,48.186 cw(c93.543,48.186) R4.1@92.416,49.313 ; 91.949,48.186 cw(c93.543,48.186) R4.1@92.416,49.313 ; 91.949,48.7 ccw(c94.039,48.7) D5.2@92.561,47.222 ; 91.949,48.7 ccw(c94.039,48.7) D5.2@92.561,47.222 ; 91.949,48.7 ccw(c94.039,48.7) D5.2@92.561,47.222 ; 91.949,48.7 ccw(c94.039,48.7) D5.2@92.561,47.222 ; 91.949,48.7 ccw(c94.039,48.7) D5.2@92.561,47.222 ; 91.949,48.7 ccw(c94.039,48.7) D5.2@92.561,47.222 ; 91.949,48.7 ccw(c94.039,48.7) D5.2@92.561,47.222 ; 91.949,48.799 cw(c92.93,48.799) R4.1@92.236,49.493 ; 91.949,48.799 cw(c92.93,48.799) R4.1@92.236,49.493 ; 91.949,48.799 cw(c92.93,48.799) R4.1@92.236,49.493 ; 91.949,48.799 cw(c92.93,48.799) R4.1@92.236,49.493 ; 91.949,48.799 cw(c92.93,48.799) R4.1@92.236,49.493 ; 91.949,48.799 cw(c92.93,48.799) R4.1@92.236,49.493 ; 91.949,48.799 cw(c92.93,48.799) R4.1@92.236,49.493
NetD6_2: D6.2 R5.1 | length 37
  Top Layer w0.254: R5.1@94.489,49.78 94.488,45.847 94.742,45.593 94.742,42.12 ; R5.1@94.489,49.78 94.489,48.894 ; R5.1@94.022,49.313 cw(c92.897,48.188) 94.488,48.188 ; R5.1@94.022,49.313 cw(c92.897,48.188) 94.488,48.188 ; R5.1@94.022,49.313 cw(c92.897,48.188) 94.488,48.188 ; R5.1@94.022,49.313 cw(c92.897,48.188) 94.488,48.188 ; R5.1@94.202,49.493 cw(c93.51,48.801) 94.488,48.801 ; R5.1@94.202,49.493 cw(c93.51,48.801) 94.488,48.801 ; R5.1@94.202,49.493 cw(c93.51,48.801) 94.488,48.801 ; R5.1@94.202,49.493 cw(c93.51,48.801) 94.488,48.801 ; R5.1@94.3,49.147 cw(c94.225,48.894) 94.489,48.894 ; R5.1@94.3,49.147 cw(c94.225,48.894) 94.489,48.894 ; R5.1@94.3,49.147 cw(c94.225,48.894) 94.489,48.894 ; R5.1@94.3,49.147 cw(c94.225,48.894) 94.489,48.894 ; R5.1@94.3,49.147 cw(c94.225,48.894) 94.489,48.894 ; R5.1@94.3,49.147 cw(c94.225,48.894) 94.489,48.894 ; R5.1@94.3,49.147 cw(c94.225,48.894) 94.489,48.894 ; R5.1@94.3,49.147 cw(c94.225,48.894) 94.489,48.894 ; R5.1@94.3,49.147 cw(c94.225,48.894) 94.489,48.894 ; D6.2@94.383,41.253 ccw(c93.516,42.12) 94.742,42.12 ; D6.2@94.383,41.253 ccw(c93.516,42.12) 94.742,42.12 ; D6.2@94.383,41.253 ccw(c93.516,42.12) 94.742,42.12 ; 94.488,48.183 cw(c96.086,48.183) R5.1@94.956,49.313 ; 94.488,48.183 cw(c96.086,48.183) R5.1@94.956,49.313 ; 94.488,48.183 cw(c96.086,48.183) R5.1@94.956,49.313 ; 94.488,48.183 cw(c96.086,48.183) R5.1@94.956,49.313 ; 94.488,48.797 cw(c95.473,48.797) R5.1@94.776,49.493 ; 94.488,48.797 cw(c95.473,48.797) R5.1@94.776,49.493 ; 94.488,48.797 cw(c95.473,48.797) R5.1@94.776,49.493 ; 94.488,48.797 cw(c95.473,48.797) R5.1@94.776,49.493 ; 94.489,48.894 cw(c94.753,48.894) R5.1@94.678,49.147 ; 94.489,48.894 cw(c94.753,48.894) R5.1@94.678,49.147 ; 94.489,48.894 cw(c94.753,48.894) R5.1@94.678,49.147 ; 94.489,48.894 cw(c94.753,48.894) R5.1@94.678,49.147 ; 94.489,48.894 cw(c94.753,48.894) R5.1@94.678,49.147 ; 94.489,48.894 cw(c94.753,48.894) R5.1@94.678,49.147 ; 94.489,48.894 cw(c94.753,48.894) R5.1@94.678,49.147 ; 94.489,48.894 cw(c94.753,48.894) R5.1@94.678,49.147 ; 94.489,48.894 cw(c94.753,48.894) R5.1@94.678,49.147 ; 94.489,48.894 cw(c94.753,48.894) R5.1@94.678,49.147 ; 94.742,42.12 ccw(c95.968,42.12) D6.2@95.101,41.253 ; 94.742,42.12 ccw(c95.968,42.12) D6.2@95.101,41.253 ; 94.742,42.12 ccw(c95.968,42.12) D6.2@95.101,41.253
NetD7_2: D7.2 R6.1 | length 42.5
  Top Layer w0.254: R6.1@97.029,49.78 97.029,47.624 ; D7.2@97.79,46.863 97.029,47.624 ; R6.1@96.562,49.313 cw(c95.435,48.186) 97.029,48.186 ; R6.1@96.562,49.313 cw(c95.435,48.186) 97.029,48.186 ; R6.1@96.562,49.313 cw(c95.435,48.186) 97.029,48.186 ; R6.1@96.562,49.313 cw(c95.435,48.186) 97.029,48.186 ; R6.1@96.562,49.313 cw(c95.435,48.186) 97.029,48.186 ; R6.1@96.562,49.313 cw(c95.435,48.186) 97.029,48.186 ; R6.1@96.562,49.313 cw(c95.435,48.186) 97.029,48.186 ; R6.1@96.742,49.493 cw(c96.048,48.799) 97.029,48.799 ; R6.1@96.742,49.493 cw(c96.048,48.799) 97.029,48.799 ; R6.1@96.742,49.493 cw(c96.048,48.799) 97.029,48.799 ; R6.1@96.742,49.493 cw(c96.048,48.799) 97.029,48.799 ; R6.1@96.742,49.493 cw(c96.048,48.799) 97.029,48.799 ; R6.1@96.742,49.493 cw(c96.048,48.799) 97.029,48.799 ; R6.1@96.742,49.493 cw(c96.048,48.799) 97.029,48.799 ; 97.029,47.624 cw(c96.403,46.998) D7.2@97.284,46.912 ; 97.029,47.624 ccw(c97.655,48.25) D7.2@97.741,47.369 ; 97.029,47.624 cw(c96.403,46.998) D7.2@97.284,46.912 ; 97.029,47.624 ccw(c97.655,48.25) D7.2@97.741,47.369 ; 97.029,47.624 ccw(c97.655,48.25) D7.2@97.741,47.369 ; 97.029,47.624 cw(c96.403,46.998) D7.2@97.284,46.912 ; 97.029,47.624 ccw(c97.655,48.25) D7.2@97.741,47.369 ; 97.029,47.624 cw(c96.403,46.998) D7.2@97.284,46.912 ; 97.029,47.624 ccw(c97.655,48.25) D7.2@97.741,47.369 ; 97.029,47.624 cw(c96.403,46.998) D7.2@97.284,46.912 ; 97.029,47.624 ccw(c97.655,48.25) D7.2@97.741,47.369 ; 97.029,47.624 cw(c96.403,46.998) D7.2@97.284,46.912 ; 97.029,47.624 ccw(c97.655,48.25) D7.2@97.741,47.369 ; 97.029,47.624 cw(c96.403,46.998) D7.2@97.284,46.912 ; 97.029,48.186 cw(c98.623,48.186) R6.1@97.496,49.313 ; 97.029,48.186 cw(c98.623,48.186) R6.1@97.496,49.313 ; 97.029,48.186 cw(c98.623,48.186) R6.1@97.496,49.313 ; 97.029,48.186 cw(c98.623,48.186) R6.1@97.496,49.313 ; 97.029,48.186 cw(c98.623,48.186) R6.1@97.496,49.313 ; 97.029,48.186 cw(c98.623,48.186) R6.1@97.496,49.313 ; 97.029,48.186 cw(c98.623,48.186) R6.1@97.496,49.313 ; 97.029,48.799 cw(c98.01,48.799) R6.1@97.316,49.493 ; 97.029,48.799 cw(c98.01,48.799) R6.1@97.316,49.493 ; 97.029,48.799 cw(c98.01,48.799) R6.1@97.316,49.493 ; 97.029,48.799 cw(c98.01,48.799) R6.1@97.316,49.493 ; 97.029,48.799 cw(c98.01,48.799) R6.1@97.316,49.493 ; 97.029,48.799 cw(c98.01,48.799) R6.1@97.316,49.493 ; 97.029,48.799 cw(c98.01,48.799) R6.1@97.316,49.493
NetD8_2: D8.2 R7.1 | length 42.9
  Top Layer w0.254: R7.1@99.569,49.78 99.569,46.608 100.33,45.847 D8.2@100.33,40.894 ; R7.1@99.102,49.313 cw(c97.975,48.186) 99.569,48.186 ; R7.1@99.102,49.313 cw(c97.975,48.186) 99.569,48.186 ; R7.1@99.102,49.313 cw(c97.975,48.186) 99.569,48.186 ; R7.1@99.102,49.313 cw(c97.975,48.186) 99.569,48.186 ; R7.1@99.102,49.313 cw(c97.975,48.186) 99.569,48.186 ; R7.1@99.282,49.493 cw(c98.588,48.799) 99.569,48.799 ; R7.1@99.282,49.493 cw(c98.588,48.799) 99.569,48.799 ; R7.1@99.282,49.493 cw(c98.588,48.799) 99.569,48.799 ; R7.1@99.282,49.493 cw(c98.588,48.799) 99.569,48.799 ; R7.1@99.282,49.493 cw(c98.588,48.799) 99.569,48.799 ; 99.569,48.186 cw(c101.163,48.186) R7.1@100.036,49.313 ; 99.569,48.186 cw(c101.163,48.186) R7.1@100.036,49.313 ; 99.569,48.186 cw(c101.163,48.186) R7.1@100.036,49.313 ; 99.569,48.186 cw(c101.163,48.186) R7.1@100.036,49.313 ; 99.569,48.186 cw(c101.163,48.186) R7.1@100.036,49.313 ; 99.569,48.799 cw(c100.55,48.799) R7.1@99.856,49.493 ; 99.569,48.799 cw(c100.55,48.799) R7.1@99.856,49.493 ; 99.569,48.799 cw(c100.55,48.799) R7.1@99.856,49.493 ; 99.569,48.799 cw(c100.55,48.799) R7.1@99.856,49.493 ; 99.569,48.799 cw(c100.55,48.799) R7.1@99.856,49.493 ; D8.2@99.971,41.253 ccw(c99.104,42.12) 100.33,42.12 ; D8.2@99.971,41.253 ccw(c99.104,42.12) 100.33,42.12 ; D8.2@99.971,41.253 ccw(c99.104,42.12) 100.33,42.12 ; D8.2@99.971,41.253 ccw(c99.104,42.12) 100.33,42.12 ; D8.2@99.971,41.253 ccw(c99.104,42.12) 100.33,42.12 ; D8.2@99.971,41.253 ccw(c99.104,42.12) 100.33,42.12 ; D8.2@99.971,41.253 ccw(c99.104,42.12) 100.33,42.12 ; 100.33,42.12 ccw(c101.556,42.12) D8.2@100.689,41.253 ; 100.33,42.12 ccw(c101.556,42.12) D8.2@100.689,41.253 ; 100.33,42.12 ccw(c101.556,42.12) D8.2@100.689,41.253 ; 100.33,42.12 ccw(c101.556,42.12) D8.2@100.689,41.253 ; 100.33,42.12 ccw(c101.556,42.12) D8.2@100.689,41.253 ; 100.33,42.12 ccw(c101.556,42.12) D8.2@100.689,41.253 ; 100.33,42.12 ccw(c101.556,42.12) D8.2@100.689,41.253
NetD9_2: D9.2 R8.1 | length 42.5
  Top Layer w0.254: R8.1@102.109,49.78 102.109,47.624 ; D9.2@102.87,46.863 102.109,47.624 ; R8.1@101.642,49.313 cw(c100.515,48.186) 102.109,48.186 ; R8.1@101.642,49.313 cw(c100.515,48.186) 102.109,48.186 ; R8.1@101.642,49.313 cw(c100.515,48.186) 102.109,48.186 ; R8.1@101.642,49.313 cw(c100.515,48.186) 102.109,48.186 ; R8.1@101.642,49.313 cw(c100.515,48.186) 102.109,48.186 ; R8.1@101.642,49.313 cw(c100.515,48.186) 102.109,48.186 ; R8.1@101.642,49.313 cw(c100.515,48.186) 102.109,48.186 ; R8.1@101.822,49.493 cw(c101.128,48.799) 102.109,48.799 ; R8.1@101.822,49.493 cw(c101.128,48.799) 102.109,48.799 ; R8.1@101.822,49.493 cw(c101.128,48.799) 102.109,48.799 ; R8.1@101.822,49.493 cw(c101.128,48.799) 102.109,48.799 ; R8.1@101.822,49.493 cw(c101.128,48.799) 102.109,48.799 ; R8.1@101.822,49.493 cw(c101.128,48.799) 102.109,48.799 ; R8.1@101.822,49.493 cw(c101.128,48.799) 102.109,48.799 ; 102.109,47.624 cw(c101.483,46.998) D9.2@102.364,46.912 ; 102.109,47.624 ccw(c102.735,48.25) D9.2@102.821,47.369 ; 102.109,47.624 cw(c101.483,46.998) D9.2@102.364,46.912 ; 102.109,47.624 ccw(c102.735,48.25) D9.2@102.821,47.369 ; 102.109,47.624 ccw(c102.735,48.25) D9.2@102.821,47.369 ; 102.109,47.624 cw(c101.483,46.998) D9.2@102.364,46.912 ; 102.109,47.624 ccw(c102.735,48.25) D9.2@102.821,47.369 ; 102.109,47.624 cw(c101.483,46.998) D9.2@102.364,46.912 ; 102.109,47.624 ccw(c102.735,48.25) D9.2@102.821,47.369 ; 102.109,47.624 cw(c101.483,46.998) D9.2@102.364,46.912 ; 102.109,47.624 ccw(c102.735,48.25) D9.2@102.821,47.369 ; 102.109,47.624 cw(c101.483,46.998) D9.2@102.364,46.912 ; 102.109,47.624 ccw(c102.735,48.25) D9.2@102.821,47.369 ; 102.109,47.624 cw(c101.483,46.998) D9.2@102.364,46.912 ; 102.109,48.186 cw(c103.703,48.186) R8.1@102.576,49.313 ; 102.109,48.186 cw(c103.703,48.186) R8.1@102.576,49.313 ; 102.109,48.186 cw(c103.703,48.186) R8.1@102.576,49.313 ; 102.109,48.186 cw(c103.703,48.186) R8.1@102.576,49.313 ; 102.109,48.186 cw(c103.703,48.186) R8.1@102.576,49.313 ; 102.109,48.186 cw(c103.703,48.186) R8.1@102.576,49.313 ; 102.109,48.186 cw(c103.703,48.186) R8.1@102.576,49.313 ; 102.109,48.799 cw(c103.09,48.799) R8.1@102.396,49.493 ; 102.109,48.799 cw(c103.09,48.799) R8.1@102.396,49.493 ; 102.109,48.799 cw(c103.09,48.799) R8.1@102.396,49.493 ; 102.109,48.799 cw(c103.09,48.799) R8.1@102.396,49.493 ; 102.109,48.799 cw(c103.09,48.799) R8.1@102.396,49.493 ; 102.109,48.799 cw(c103.09,48.799) R8.1@102.396,49.493 ; 102.109,48.799 cw(c103.09,48.799) R8.1@102.396,49.493
NetD10_2: D10.2 R9.1 | length 49.4
  Top Layer w0.254: R9.1@104.649,49.78 104.649,49.148 105.918,47.879 D10.2@105.918,40.894 ; R9.1@104.794,49.732 ccw(c105.68,49.438) 105.02,48.777 ; R9.1@104.794,49.732 ccw(c105.68,49.438) 105.02,48.777 ; R9.1@104.794,49.732 ccw(c105.68,49.438) 105.02,48.777 ; R9.1@104.794,49.732 ccw(c105.68,49.438) 105.02,48.777 ; R9.1@104.794,49.732 ccw(c105.68,49.438) 105.02,48.777 ; R9.1@104.794,49.732 ccw(c105.68,49.438) 105.02,48.777 ; R9.1@104.794,49.732 ccw(c105.68,49.438) 105.02,48.777 ; R9.1@105.035,49.652 ccw(c106.118,49.293) 105.311,48.486 ; R9.1@105.035,49.652 ccw(c106.118,49.293) 105.311,48.486 ; R9.1@105.035,49.652 ccw(c106.118,49.293) 105.311,48.486 ; R9.1@105.035,49.652 ccw(c106.118,49.293) 105.311,48.486 ; R9.1@105.035,49.652 ccw(c106.118,49.293) 105.311,48.486 ; R9.1@105.035,49.652 ccw(c106.118,49.293) 105.311,48.486 ; R9.1@105.035,49.652 ccw(c106.118,49.293) 105.311,48.486 ; R9.1@105.276,49.572 ccw(c106.555,49.148) 105.602,48.195 ; R9.1@105.276,49.572 ccw(c106.555,49.148) 105.602,48.195 ; R9.1@105.276,49.572 ccw(c106.555,49.148) 105.602,48.195 ; R9.1@105.276,49.572 ccw(c106.555,49.148) 105.602,48.195 ; R9.1@105.276,49.572 ccw(c106.555,49.148) 105.602,48.195 ; R9.1@105.276,49.572 ccw(c106.555,49.148) 105.602,48.195 ; R9.1@105.276,49.572 ccw(c106.555,49.148) 105.602,48.195 ; D10.2@105.559,41.253 ccw(c104.692,42.12) 105.918,42.12 ; D10.2@105.559,41.253 ccw(c104.692,42.12) 105.918,42.12 ; D10.2@105.559,41.253 ccw(c104.692,42.12) 105.918,42.12 ; D10.2@105.559,41.253 ccw(c104.692,42.12) 105.918,42.12 ; D10.2@105.559,41.253 ccw(c104.692,42.12) 105.918,42.12 ; D10.2@105.559,41.253 ccw(c104.692,42.12) 105.918,42.12 ; D10.2@105.559,41.253 ccw(c104.692,42.12) 105.918,42.12 ; 105.918,42.12 ccw(c107.144,42.12) D10.2@106.277,41.253 ; 105.918,42.12 ccw(c107.144,42.12) D10.2@106.277,41.253 ; 105.918,42.12 ccw(c107.144,42.12) D10.2@106.277,41.253 ; 105.918,42.12 ccw(c107.144,42.12) D10.2@106.277,41.253 ; 105.918,42.12 ccw(c107.144,42.12) D10.2@106.277,41.253 ; 105.918,42.12 ccw(c107.144,42.12) D10.2@106.277,41.253 ; 105.918,42.12 ccw(c107.144,42.12) D10.2@106.277,41.253
NetD11_2: D11.2 R10.1 | length 42.5
  Top Layer w0.254: R10.1@107.189,49.78 107.189,47.624 ; D11.2@107.95,46.863 107.189,47.624 ; R10.1@106.722,49.313 cw(c105.595,48.186) 107.189,48.186 ; R10.1@106.722,49.313 cw(c105.595,48.186) 107.189,48.186 ; R10.1@106.722,49.313 cw(c105.595,48.186) 107.189,48.186 ; R10.1@106.722,49.313 cw(c105.595,48.186) 107.189,48.186 ; R10.1@106.722,49.313 cw(c105.595,48.186) 107.189,48.186 ; R10.1@106.722,49.313 cw(c105.595,48.186) 107.189,48.186 ; R10.1@106.722,49.313 cw(c105.595,48.186) 107.189,48.186 ; R10.1@106.902,49.493 cw(c106.208,48.799) 107.189,48.799 ; R10.1@106.902,49.493 cw(c106.208,48.799) 107.189,48.799 ; R10.1@106.902,49.493 cw(c106.208,48.799) 107.189,48.799 ; R10.1@106.902,49.493 cw(c106.208,48.799) 107.189,48.799 ; R10.1@106.902,49.493 cw(c106.208,48.799) 107.189,48.799 ; R10.1@106.902,49.493 cw(c106.208,48.799) 107.189,48.799 ; R10.1@106.902,49.493 cw(c106.208,48.799) 107.189,48.799 ; 107.189,47.624 cw(c106.563,46.998) D11.2@107.444,46.912 ; 107.189,47.624 ccw(c107.815,48.25) D11.2@107.901,47.369 ; 107.189,47.624 cw(c106.563,46.998) D11.2@107.444,46.912 ; 107.189,47.624 ccw(c107.815,48.25) D11.2@107.901,47.369 ; 107.189,47.624 ccw(c107.815,48.25) D11.2@107.901,47.369 ; 107.189,47.624 cw(c106.563,46.998) D11.2@107.444,46.912 ; 107.189,47.624 ccw(c107.815,48.25) D11.2@107.901,47.369 ; 107.189,47.624 cw(c106.563,46.998) D11.2@107.444,46.912 ; 107.189,47.624 ccw(c107.815,48.25) D11.2@107.901,47.369 ; 107.189,47.624 cw(c106.563,46.998) D11.2@107.444,46.912 ; 107.189,47.624 ccw(c107.815,48.25) D11.2@107.901,47.369 ; 107.189,47.624 cw(c106.563,46.998) D11.2@107.444,46.912 ; 107.189,47.624 ccw(c107.815,48.25) D11.2@107.901,47.369 ; 107.189,47.624 cw(c106.563,46.998) D11.2@107.444,46.912 ; 107.189,48.186 cw(c108.783,48.186) R10.1@107.656,49.313 ; 107.189,48.186 cw(c108.783,48.186) R10.1@107.656,49.313 ; 107.189,48.186 cw(c108.783,48.186) R10.1@107.656,49.313 ; 107.189,48.186 cw(c108.783,48.186) R10.1@107.656,49.313 ; 107.189,48.186 cw(c108.783,48.186) R10.1@107.656,49.313 ; 107.189,48.186 cw(c108.783,48.186) R10.1@107.656,49.313 ; 107.189,48.186 cw(c108.783,48.186) R10.1@107.656,49.313 ; 107.189,48.799 cw(c108.17,48.799) R10.1@107.476,49.493 ; 107.189,48.799 cw(c108.17,48.799) R10.1@107.476,49.493 ; 107.189,48.799 cw(c108.17,48.799) R10.1@107.476,49.493 ; 107.189,48.799 cw(c108.17,48.799) R10.1@107.476,49.493 ; 107.189,48.799 cw(c108.17,48.799) R10.1@107.476,49.493 ; 107.189,48.799 cw(c108.17,48.799) R10.1@107.476,49.493 ; 107.189,48.799 cw(c108.17,48.799) R10.1@107.476,49.493